# Altium PCB mother_board_2023-07-21.pcbdoc
Units mil, origin at the board's own origin, x right, y up, seen from the top; angles counter-clockwise.
Board outline 4136.22 x 3813.33 mil, 2 copper layers (Top Layer, Bottom Layer); 43 components, 99 nets, 200 pads, 360 vias.
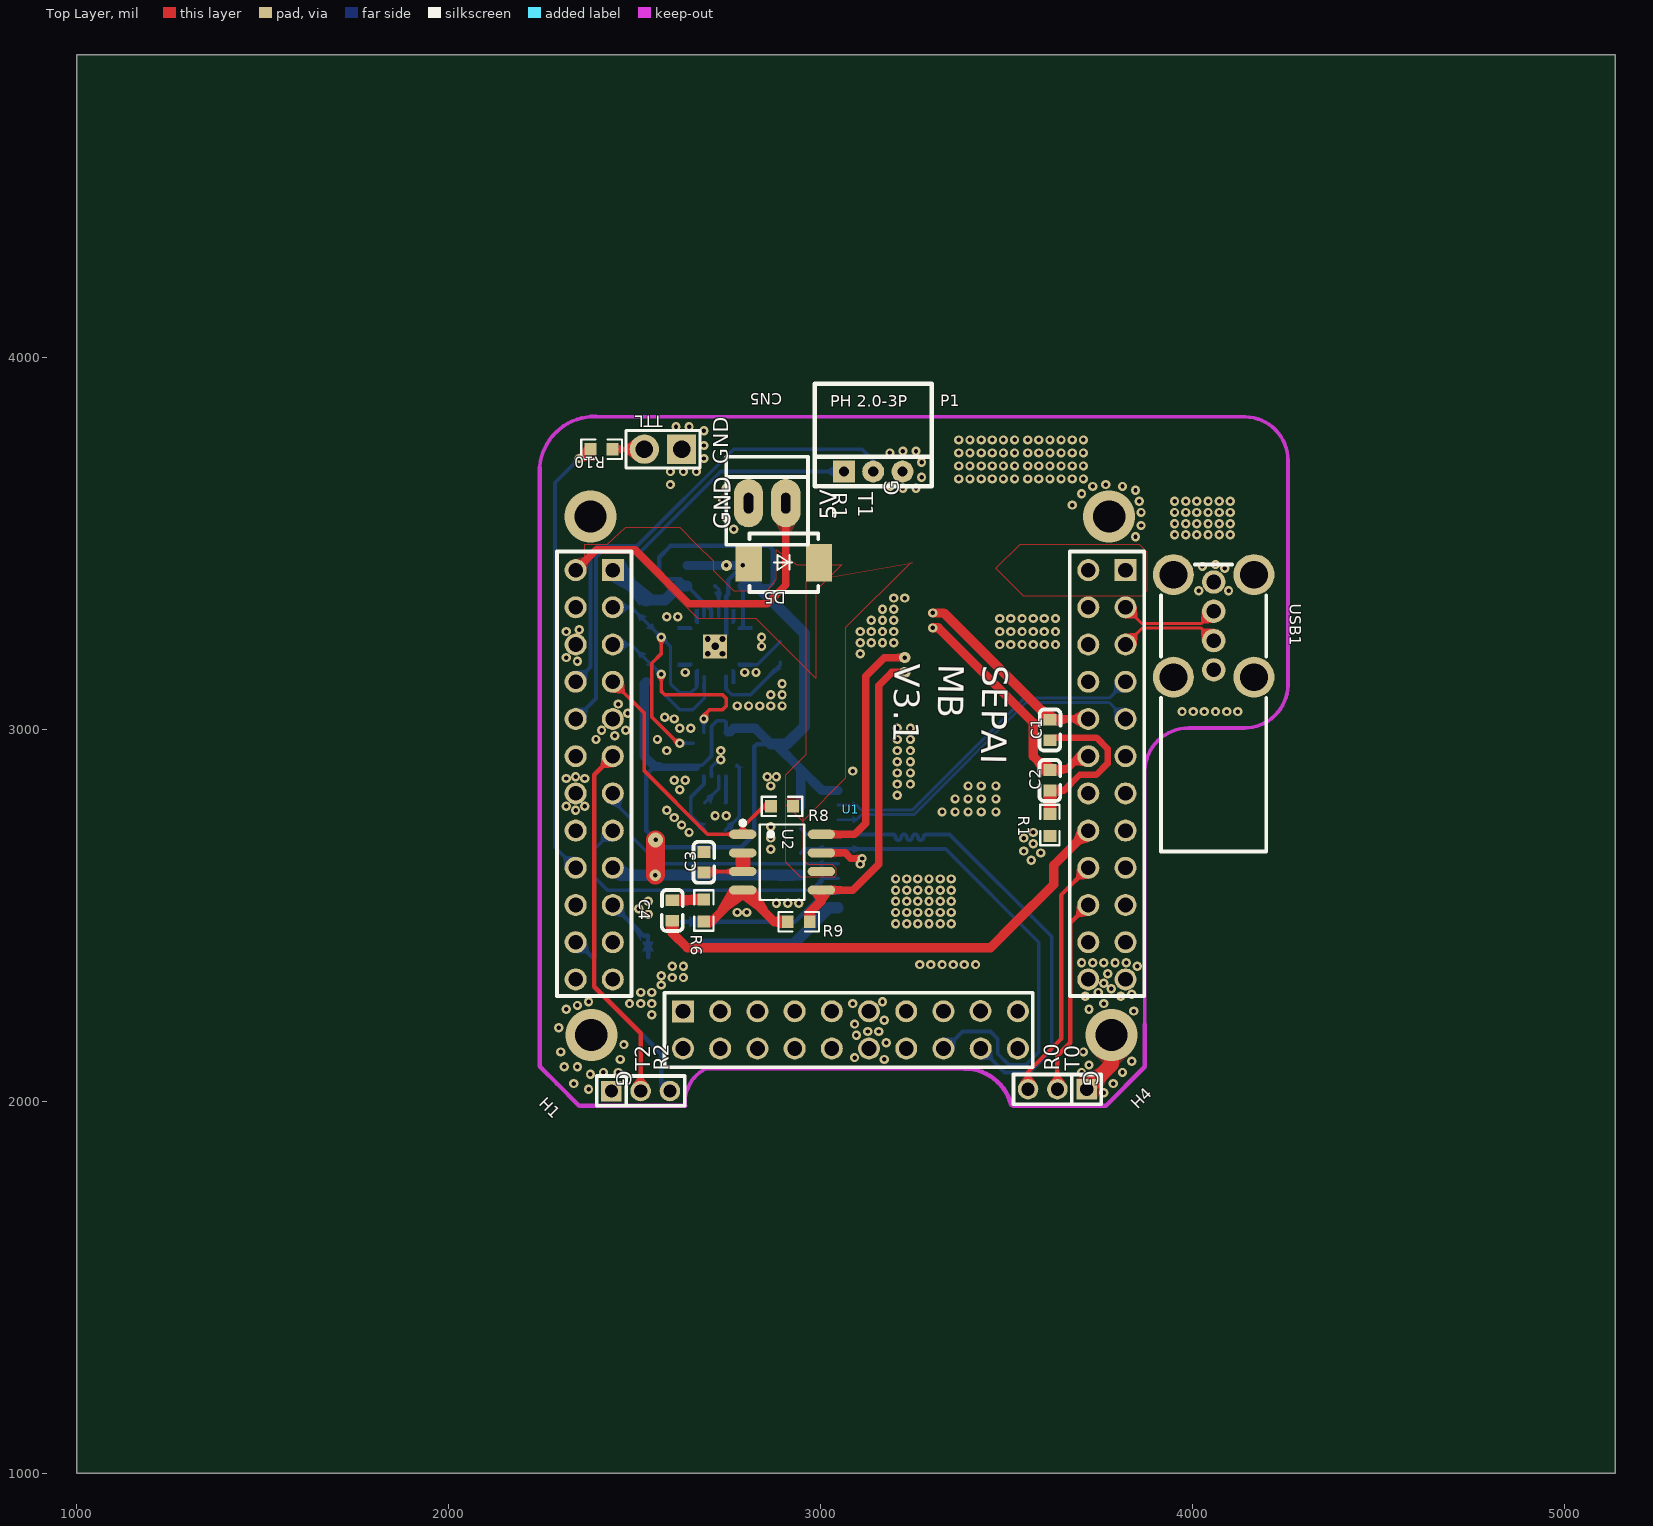
[diagram p0: Top Layer view]
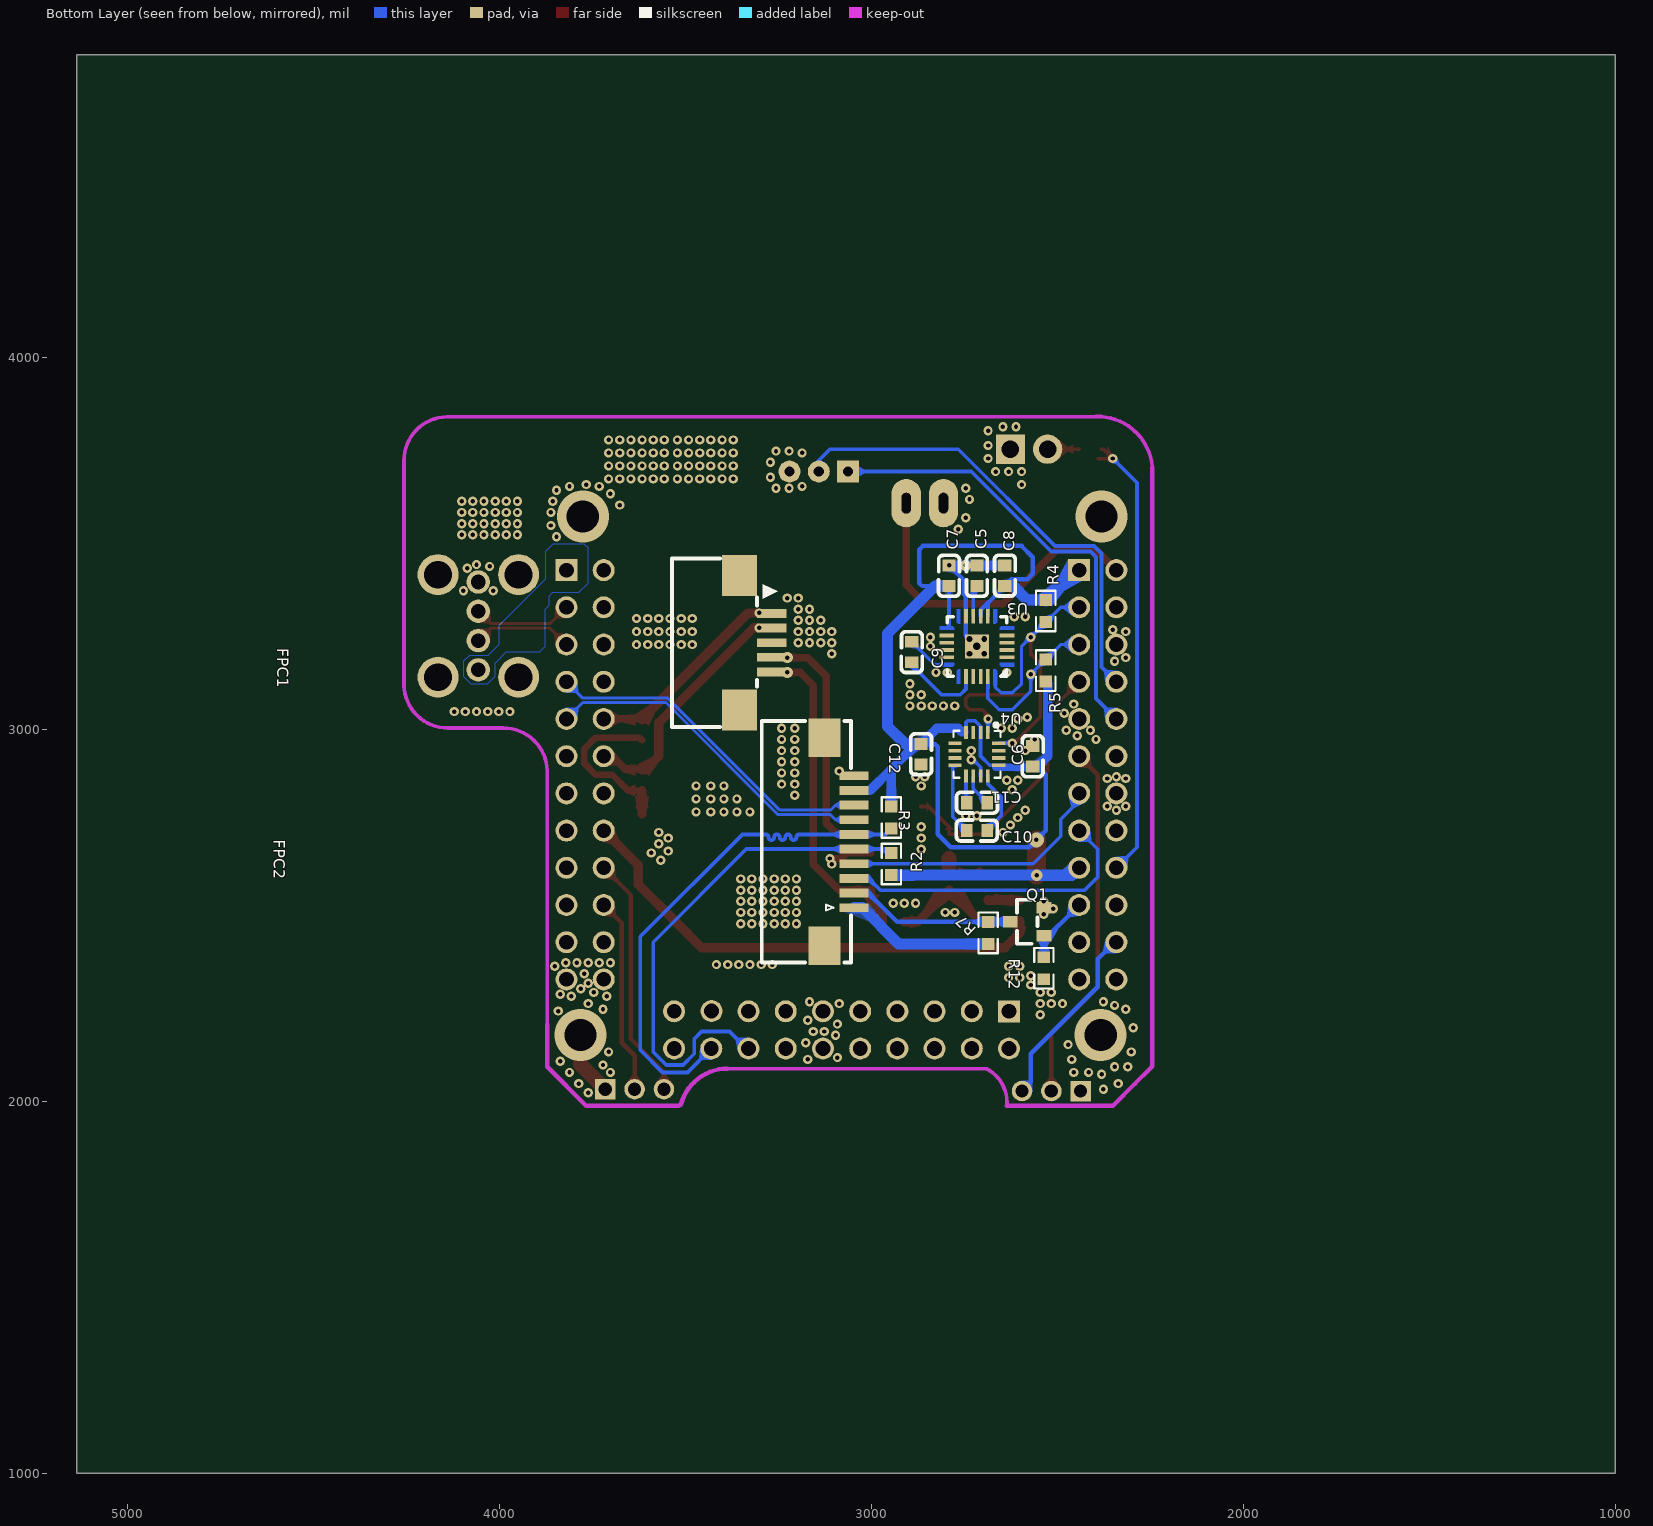
[diagram p1: Bottom Layer view, seen from below]

## Layer stack, top to bottom
Top Layer: signal copper (thickness not stored)
Dielectric: dielectric 12.6, FR-4, Dk 4.8
Bottom Layer: signal copper (thickness not stored)

## Board outline
5136.22,1000 1000,1000 1000,4813.33 5136.22,4813.33

## Components (designator, comment, footprint, x,y, rotation, side; value= is the part's Value field where it differs from the comment)
C1 "33pF" C0603#1 3616.22,2997.53 r270 top
C2 "33pF" C0603#1 3616.22,2862.53 r90 top
C3 "1.0uF" C0603#1 2686.22,2642.53 r90 top
C4 "0.39uF" C0603#1 2601.22,2512.53 r270 top
C5 "0.1uF" C0603#2 2716.22,3412.53 r270 bottom
C6 "0.1uF" C0603#2 2566.22,2927.53 r270 bottom
C7 "0.1uF" C0603#2 2791.22,3412.53 r270 bottom
C8 "0.1uF" C0603#2 2641.22,3412.53 r90 bottom
C9 "2.2nF" C0603#2 2891.22,3207.53 r270 bottom
C10 "0.22uF" C0603#2 2716.22,2727.53 r0 bottom
C11 "4.7uF" C0603#2 2716.22,2802.53 r180 bottom
C12 "0.1uF" C0603#2 2866.22,2932.53 r90 bottom
CN5 "640454-2" CONN-TH_640454-2 2856.22,3607.53 r180 top
D5 "SMBJ5.0A_C10204" SMB_L4.6-W3.6-LS5.3-R-RD 2901.22,3447.53 r180 top
FPC1 "FFC10001-05SBB124W5M" FFC-SMD_FFC10001-05SBB124W5M 3311.22,3232.53 r90 bottom
FPC2 "FFC10001-10SBB124W5M" FFC-SMD_FFC10001-10SBB124W5M 3086.22,2697.53 r90 bottom
H1 "PZ200V-11-03P" HDR-TH_3P-P2.00-V-M 2516.22,2027.53 r0 top
H4 "PZ200V-11-03P" HDR-TH_3P-P2.00-V-M 3636.22,2032.53 r180 top
P1 "PH 2.0-3P 弯针" "PH 2.0-3P" 3141.22,3692.53 r0 top
Q1 "2N7002H-7" SOT-23_L2.9-W1.3-P1.90-LS2.4-BR 2581.22,2482.53 r0 bottom
R1 "0" MY_R0603#1 3616.22,2742.53 r270 top
R2 "2.2K" MY_R0603#2 2946.22,2637.53 r270 bottom
R3 "2.2K" MY_R0603#2 2946.22,2762.53 r90 bottom
R4 "2.2K" MY_R0603#2 2531.22,3317.53 r90 bottom
R5 "2.2K" MY_R0603#2 2531.22,3157.53 r270 bottom
R6 "20K" MY_R0603#1 2686.22,2512.53 r270 top
R7 "300" MY_R0603#2 2686.22,2452.53 r270 bottom
R8 "10K" MY_R0603#1 2896.22,2792.53 r0 top
R9 "20K" MY_R0603#1 2941.22,2482.53 r0 top
R10 "2.2K" MY_R0603#1 2411.22,3752.53 r180 top
R12 "10K" MY_R0603#2 2536.22,2357.53 r90 bottom
TTL "PZ254-1-02-Z-8.5" HDR-TH_2P-P2.54-V-M 2576.22,3752.53 r180 top
U1 "NANO Pi NEO CORE" NANO_PI_MOD 2441.22,2327.53 r0 top
U2 "FM8002A" SOP-8_L4.9-W3.9-P1.27-LS6.0-BL 2896.22,2642.53 r270 top
U3 "MPU-6050_C24112" LGA-24_L4.0-W4.0-P0.50-BL 2716.22,3222.53 r180 bottom
U4 "QMC5883L" MY_LGA-16_L3.0-W3.0-P0.50-BL_SQ 2716.22,2932.53 r180 bottom
USB1 "USB04-212-17-10" USB-A-TH_USB04-212-17-10B 4056.22,3277.53 r0 top
? "" ? 3076.22,3857.53 r0 top
? "" ? 2156.81,2875.13 r0 top
? "" ? 3136.22,2084.77 r0 top
? "" ? 3078.72,3899.43 r0 top
? "" ? 1986.61,2875.03 r0 top
? "" ? 2065.22,3755.02 r0 top

## Footprints (in the part's own frame and the unit in brackets; to place one, negate y for a bottom-side part, rotate by r counter-clockwise, add the part's x,y. Pads: shape width x height; smd on the part's side, far side on the other; paste and mask are expansions set on the pad)
C0603#1 [mm]
  rect 0.8x0.9 smd paste+0 mask+0.051: 1(-0.7,0) 2(0.7,0)
  silkscreen extent -1.41,-0.71 1.39,0.72
C0603#2 [mm]
  rect 0.8x0.9 smd paste+0 mask+0.051: 1(0.7,0) 2(-0.7,0)
  silkscreen extent -1.39,-0.72 1.41,0.71
CONN-TH_640454-2 [mil]
  oval 78.74x130 hole 25 slot 55 at 90 deg paste+0 mask+2: 1(-50,-0.01) 2(50,-0.01)
  silkscreen extent -110,-125 110,111
FFC-SMD_FFC10001-05SBB124W5M [mm]
  rect 0.6x2 smd paste+0 mask+0.051: 1(2,-1.1) 2(1,-1.1) 3(0,-1.1) 4(-1,-1.1) 5(-2,-1.1)
  rect 2.8x2.4 smd paste+0 mask+0.051: 6(-4.6,1.1) 7(4.6,1.1)
  silkscreen extent -5.75,-1.5 5.75,5.7
FFC-SMD_FFC10001-10SBB124W5M [mm]
  rect 0.6x2 smd paste+0 mask+0.051: 1(-4.5,-1) 2(-3.5,-1) 3(-2.5,-1) 4(-1.5,-1) 5(-0.5,-1) 6(0.5,-1) 7(1.5,-1) 8(2.5,-1) 9(3.5,-1) 10(4.5,-1)
  rect 2.6x2.2 smd paste+0 mask+0.051: 11(-7.1,1) 12(7.1,1)
  silkscreen extent -8.25,-0.8 8.25,5.3
HDR-TH_2P-P2.54-V-M [mm]
  rect 2x2 hole 1.2 paste+0 mask+0.051: 1(-1.27,0)
  round 2 hole 1.2 paste+0 mask+0.051: 2(1.27,0)
  silkscreen extent -2.54,-1.27 2.54,1.27
HDR-TH_3P-P2.00-V-M [mm]
  rect 1.4x1.4 hole 0.9 paste+0 mask+0.051: 1(-2,0)
  round 1.4 hole 0.9 paste+0 mask+0.051: 2(0,0) 3(2,0)
  silkscreen extent -2.99,-1 3,1.03
LGA-24_L4.0-W4.0-P0.50-BL [mm]
  rect 1x0.25 smd paste+0 mask+0.05: 2(2.05,-0.75) 3(2.05,-0.25) 4(2.05,0.25) 5(2.05,0.75) 14(-2.05,0.75) 15(-2.05,0.25) 16(-2.05,-0.25) 17(-2.05,-0.75)
  rect 0.25x1 smd paste+0 mask+0.05: 8(0.75,2.05) 9(0.25,2.05) 10(-0.25,2.05) 11(-0.75,2.05) 20(-0.75,-2.05) 21(-0.25,-2.05) 22(0.25,-2.05) 23(0.75,-2.05)
  Top Layer region: 2.55,-1.375 1.65,-1.375 1.55,-1.275 1.55,-1.125 2.55,-1.125
  Top Layer region: 1.375,-2.55 1.125,-2.55 1.125,-1.55 1.275,-1.55 1.375,-1.65
  Top Layer region: -1.375,-2.55 -1.125,-2.55 -1.125,-1.55 -1.275,-1.55 -1.375,-1.65
  Top Layer region: 1.375,2.55 1.125,2.55 1.125,1.55 1.275,1.55 1.375,1.65
  Top Layer region: -1.375,2.55 -1.125,2.55 -1.125,1.55 -1.275,1.55 -1.375,1.65
  Top Layer region: 2.55,1.375 1.65,1.375 1.55,1.275 1.55,1.125 2.55,1.125
  Top Layer region: -2.55,1.375 -1.65,1.375 -1.55,1.275 -1.55,1.125 -2.55,1.125
  Top Layer region: -2.55,-1.375 -1.65,-1.375 -1.55,-1.275 -1.55,-1.125 -2.55,-1.125
  silkscreen extent -2.03,-2.03 2.03,2.03
MY_LGA-16_L3.0-W3.0-P0.50-BL_SQ [mm]
  rect 0.25x0.9 smd paste+0 mask+0.051: 1(0.75,1.488) 2(0.25,1.488) 3(-0.25,1.488) 4(-0.75,1.488) 9(-0.75,-1.488) 10(-0.25,-1.488) 11(0.25,-1.488) 12(0.75,-1.488)
  rect 0.9x0.25 smd paste+0 mask+0.051: 5(-1.488,0.75) 6(-1.488,0.25) 7(-1.488,-0.25) 8(-1.488,-0.75) 13(1.488,-0.75) 14(1.488,-0.25) 15(1.488,0.25) 16(1.488,0.75)
  silkscreen extent -1.61,-1.6 1.61,2.13
MY_R0603#1 [mil]
  rect 31.75x34.02 smd paste-3937.01 mask+2: 1(-29.66,0) 2(29.65,0)
  silkscreen extent -55,-26 55,26
MY_R0603#2 [mil]
  rect 31.75x34.02 smd paste-3937.01 mask+2: 1(29.65,0) 2(-29.66,0)
  silkscreen extent -55,-26 55,26
NANO_PI_MOD [mm]
  rect 1.5x1.5 hole 1 paste+0 mask+0.051: 1(35.006,27.94) 25(4.796,-2.18) 45(0.006,27.94)
  round 1.5 hole 1 paste+0 mask+0.051: 2(35.006,25.4) 3(35.006,22.86) 4(35.006,20.32) 5(35.006,17.78) 6(35.006,15.24) 7(35.006,12.7) 8(35.006,10.16) 9(35.006,7.62) 10(35.006,5.08) 11(35.006,2.54) 12(35.006,0) 13(32.466,27.94) 14(32.466,25.4) 15(32.466,22.86) 16(32.466,20.32) 17(32.466,17.78) 18(32.466,15.24) 19(32.466,12.7) 20(32.466,10.16) 21(32.466,7.62) 22(32.466,5.08) 23(32.466,2.54) 24(32.466,0) 26(7.336,-2.18) 27(9.876,-2.18) 28(12.416,-2.18) 29(14.956,-2.18) 30(17.496,-2.18) 31(20.036,-2.18) 32(22.576,-2.18) 33(25.1,-2.159) 34(27.656,-2.18) 35(4.796,-4.72) 36(7.336,-4.72) 37(9.876,-4.72) 38(12.416,-4.72) 39(14.956,-4.72) 40(17.496,-4.72) 41(20.036,-4.72) 42(22.576,-4.72) 43(25.116,-4.72) 44(27.656,-4.72) 46(0.006,25.4) 47(0.006,22.86) 48(0.006,20.32) 49(0.006,17.78) 50(0.006,15.24) 51(0.006,12.7) 52(0.006,10.16) 53(0.006,7.62) 54(0.006,5.08) 55(0.006,2.54) 56(0.006,0) 57(-2.534,27.94) 58(-2.534,25.4) 59(-2.534,22.86) 60(-2.534,20.32) 61(-2.534,17.78) 62(-2.534,15.24) 63(-2.534,12.7) 64(-2.534,10.16) 65(-2.534,7.62) 66(-2.534,5.08) 67(-2.534,2.54) 68(-2.534,0)
  silkscreen extent -3.8,-5.99 36.28,29.21
"PH 2.0-3P" [mm]
  rect 1.5x1.5 hole 0.7 paste+0 mask+0.102: 1(-2,0)
  round 1.5 hole 0.7 paste+0 mask+0.102: 2(0,0) 3(1.999,0)
  silkscreen extent -4,-1 4,6
SMB_L4.6-W3.6-LS5.3-R-RD [mm]
  rect 1.8x2.54 smd paste+0 mask+0.051: 1(2.4,0) 2(-2.4,0)
  silkscreen extent -2.35,-2 2.35,2
SOP-8_L4.9-W3.9-P1.27-LS6.0-BL [mm]
  oval 0.63x1.865 smd paste+0 mask+0.051: 1(-1.905,-2.682) 2(-0.635,-2.682) 3(0.635,-2.682) 4(1.905,-2.682) 5(1.905,2.682) 6(0.635,2.682) 7(-0.635,2.682) 8(-1.905,2.682)
  silkscreen extent -2.82,-2.83 2.58,1.52
SOT-23_L2.9-W1.3-P1.90-LS2.4-BR [mm]
  rect 1x0.8 smd paste+0 mask+0.051: 1(-1.15,0.95) 2(-1.15,-0.95) 3(1.15,0)
  silkscreen extent -0.7,-1.5 0.7,1.5
USB-A-TH_USB04-212-17-10B [mm]
  round 1.6 hole 1 paste+0 mask+0.051: 1(0,-3) 2(0,-1) 3(0,1) 4(0,3)
  round 2.8 hole 1.9 paste+0 mask+0.051: 5(-2.75,-3.5) 5(-2.75,3.5) 5(2.75,-3.5) 5(2.75,3.5)
  silkscreen extent -3.6,-15.4 3.6,4.2
? [mil]

## Free pads (board coordinates)
  rect 65x65 hole 20 paste+0 mask+2: 1(2716.22,3222.53)

## Via types
v1: diameter 25, hole 12.01, Top Layer to Bottom Layer, tented both sides, 339 vias
v2: diameter 25, hole 12, Top Layer to Bottom Layer, tented both sides, 5 vias
v3: diameter 140, hole 86.61, Top Layer to Bottom Layer, tented both sides, 4 vias
v4: diameter 25, hole 15, Top Layer to Bottom Layer, tented both sides, 4 vias
v5: diameter 30, hole 12, Top Layer to Bottom Layer, tented both sides, 3 vias
v6: diameter 30, hole 12.01, Top Layer to Bottom Layer, tented both sides, 2 vias
v7: diameter 24.41, hole 12.2, Top Layer to Bottom Layer, tented both sides, 2 vias
v8: diameter 40, hole 12, Top Layer to Bottom Layer, tented both sides, 1 vias

## Nets (pads, with @x,y where several pads share a name; then routed paths per layer and width w, separated by ;. In a path a pad name is that pad's centre, name@x,y a point inside that pad or via, vN(x,y) a via of type N, cw(c..) or ccw(c..) an arc to the next point about the centre after c; other vN are vias at no path point)
3.3V: C6.1 C7.1 C8.2 C12.1 FPC2.9 R2.1 R3.1 R4.1 R5.1 U1.44 U1.45 U1.53 U3.8 U3.9 U4.2 U4.4 U4.13 | length 4160.9
  Top Layer w50: v5(2555.59,2607.59) 2556.22,2608.22 v8(2556.22,2702.53)
  Bottom Layer w10: C8.2@2641.22,3384.93 2686.72,3339.53 U3.8 ; U4.13 2681.72,2903.03 2706.42,2927.73 U4.2 2706.42,3007.73 2721.22,3022.53 2741.22,3022.53 2745.72,3018.03 U4.4 ; C7.1@2791.22,3384.93 2791.22,3277.43 2796.92,3271.73
  Bottom Layer w12: C6.1@2566.22,2899.93 2553.62,2899.93 2531.22,2877.53 2531.22,2727.53 v8(2556.22,2702.53) 2576.22,2682.53 2786.22,2682.53 2821.22,2717.53 2821.22,2952.53 2828.82,2960.13 C12.1 ; C8.2@2641.22,3384.93 2623.62,3402.53 2581.22,3402.53 2566.22,3417.53 2566.22,3462.53 2596.22,3492.53 2861.22,3492.53 2871.22,3482.53 2871.22,3392.53 2863.62,3384.93 C7.1@2791.22,3384.93 ; 2686.72,3339.53 2706.42,3319.83 U3.9
  Bottom Layer w20: C6.1@2566.22,2899.93 2568.62,2897.53 2666.22,2897.53
  Bottom Layer w25: R5.1@2531.22,3127.83 2526.22,3122.83 2526.22,2927.53 2553.82,2899.93 C6.1@2566.22,2899.93 ; 2751.22,2992.53 2756.22,2992.53 2766.22,3002.53 2823.82,3002.53 C12.1 2878.62,2960.13 2946.22,2892.53 ; R3.1 2946.22,2892.53 ; FPC2.9 3003.42,2835.33 2946.22,2892.53
  Bottom Layer w30: U1.53@2441.42,2627.53 2461.42,2607.53 v5(2555.59,2607.59) ; R4.1 2581.22,3347.53 2618.62,3384.93 C8.2@2641.22,3384.93 ; v5(2555.59,2607.59) R2.1@2946.22,2607.83 ; C7.1@2791.22,3384.93 2828.82,3384.93 2956.22,3257.53 2956.22,3007.53 2908.82,2960.13 C12.1
  Bottom Layer w35: U1.45@2441.42,3427.53 2450.92,3427.53 R4.1
5V: CN5.1 D5.2 FPC2.1 R7.1 R8.2 U1.1 U1.23 U1.33 U1.34 U1.57 U1.58 U2.6 USB1.1 | length 1289.3
  Top Layer w20: U1.57@2341.42,3427.53 2396.42,3482.53 2501.22,3482.53 2646.22,3337.53 2856.22,3337.53 2906.22,3387.53 CN5.1
  Bottom Layer w30: R7.1@2686.22,2422.83 2926.52,2422.83 3024.02,2520.33 FPC2.1@3046.82,2520.33
AGND: C1.2 C2.1 R1.1 | length 458.3
  Top Layer w17.72: C2.1@3616.22,2834.93 3653.62,2834.93 3696.22,2877.53 3741.22,2877.53 3771.22,2907.53 3771.22,2947.53 3741.22,2977.53 3623.82,2977.53 C1.2@3616.22,2969.93
  Top Layer w25: R1.1 C2.1@3616.22,2834.93
D1+: U1.2 USB1.3 | length 268.9
  Top Layer w7.99: U1.2 3863.46,3283.49 3907.49,3283.49 3945.15,3283.49 3982.81,3283.49 4022.81,3283.49 USB1.3
D1-: U1.3 USB1.2 | length 268.9
  Top Layer w7.99: U1.3 3863.46,3271.56 3907.49,3271.56 3940.21,3271.56 3977.87,3271.56 4022.81,3271.56 USB1.2
D2+: FPC2.8 U1.4 | length 921.3
  Bottom Layer w7.99: FPC2.8@3046.82,2795.93 3096.22,2795.93 3109.92,2782.23 3149.92,2782.23 3245.92,2782.23 3251.22,2787.53 3547.22,3083.53 3731.32,3083.53 3775.42,3083.53 U1.4
D2-: FPC2.7 U1.5 | length 921.2
  Bottom Layer w7.99: FPC2.7 3096.22,2756.63 3109.92,2770.33 3149.92,2770.33 3250.82,2770.33 3256.12,2775.63 3552.12,3071.53 3731.32,3071.53 3775.42,3071.53 U1.5
FPC1_3: FPC1.3
FPC1_6: FPC1.6
FPC1_7: FPC1.7
FPC2_11: FPC2.11
FPC2_12: FPC2.12
GND: C3.2 C5.2 C6.2 C7.2 C8.1 C9.2 C11.2 C12.2 CN5.2 D5.1 FPC2.10 H1.1 H4.1 P1.3 pad.1 Q1.2 R1.2 R12.2 TTL.1 U1.12 U1.24 U1.30 U1.40 U1.49 U1.59 U1.63 U1.66 U2.7 U3.11 U4.9 U4.11 USB1.4 | length 936.6
  Top Layer w20: U2.7 3066.22,2667.53 3081.22,2652.53 v1(3111.22,2652.53)
  Top Layer w39.37: H4.1@3714.92,2032.53 3781.72,2099.33 v3@3781.72,2178.23
  Bottom Layer w10: U4.11@2706.42,2873.93 2706.22,2897.53 2726.22,2917.53 v1(2731.22,2917.53) ; C11.2 2745.72,2802.53 U4.9@2745.72,2873.93 ; 2796.92,3173.33 2829.42,3173.33 C9.2
  Bottom Layer w12: pad.1 2745.72,3252.03 U3.11 2745.72,3357.03 2751.22,3362.53 2751.22,3400.13 v5(2791.22,3440.09)
  Bottom Layer w25: C8.1 C5.2@2715.12,3440.13 ; C5.2 v5(2791.22,3440.09)
  other v1: 3761.22,2022.53 2376.22,2032.53 2336.22,2047.53 3786.22,2047.53 2381.22,2072.53 2416.22,2077.53 2456.22,2077.53 3701.22,2077.53 3811.22,2077.53 2311.22,2092.53 2346.22,2092.53 3721.22,2097.53 3836.22,2107.53 2461.22,2112.53 3171.22,2112.53 3091.22,2117.53 2301.22,2132.53 3706.22,2132.53 2471.22,2152.53 3176.22,2157.53 3096.22,2177.53 3126.22,2187.53 3156.22,2187.53 2296.22,2197.53 3091.22,2207.53 3171.22,2217.53 2546.22,2232.53 3841.22,2242.53 2316.22,2247.53 3721.22,2247.53 2346.22,2257.53 2486.22,2262.53 2516.22,2262.53 2546.22,2262.53 3086.22,2262.53 3761.22,2262.53 2376.22,2267.53 3166.22,2267.53 3711.22,2282.53 3806.22,2282.53 3836.22,2287.53 2516.22,2292.53 2546.22,2292.53 3746.22,2292.53 3781.22,2302.53 2571.22,2312.53 3761.22,2317.53 2601.22,2332.53 2631.22,2332.53 2571.22,2337.53 3771.22,2342.53 2601.22,2362.53 2631.22,2362.53 3851.22,2362.53 3266.22,2367.53 3296.22,2367.53 3326.22,2367.53 3356.22,2367.53 3386.22,2367.53 3416.22,2367.53 3701.22,2372.53 3731.22,2372.53 3761.22,2372.53 3791.22,2372.53 3821.22,2372.53 3201.22,2477.53 3231.22,2477.53 3261.22,2477.53 3291.22,2477.53 3321.22,2477.53 3351.22,2477.53 2536.22,2502.53 2776.22,2507.53 2801.22,2507.53 3201.22,2507.53 3231.22,2507.53 3261.22,2507.53 3291.22,2507.53 3321.22,2507.53 3351.22,2507.53 2511.22,2517.53 2881.22,2532.53 2911.22,2532.53 2941.22,2532.53 2536.22,2537.53 3201.22,2537.53 3231.22,2537.53 3261.22,2537.53 3291.22,2537.53 3321.22,2537.53 3351.22,2537.53 3201.22,2567.53 3231.22,2567.53 3261.22,2567.53 3291.22,2567.53 3321.22,2567.53 3351.22,2567.53 3201.22,2597.53 3231.22,2597.53 3261.22,2597.53 3291.22,2597.53 3321.22,2597.53 3351.22,2597.53 3106.22,2637.53 3566.22,2647.53 3591.22,2667.53 3546.22,2672.53 2866.22,2677.53 3571.22,2692.53 2866.22,2707.53 3546.22,2707.53 2646.22,2722.53 3571.22,2722.53 2866.22,2737.53 2626.22,2742.53 2606.22,2762.53 2716.22,2767.53 2746.22,2767.53 3326.22,2777.53 3361.22,2777.53 3396.22,2777.53 3431.22,2777.53 3471.22,2777.53 2341.22,2782.53 2586.22,2782.53 2316.22,2792.53 2366.22,2792.53 3361.22,2812.53 3396.22,2812.53 3431.22,2812.53 3471.22,2812.53 3206.22,2822.53 2621.22,2837.53 2866.22,2847.53 3396.22,2847.53 3431.22,2847.53 3471.22,2847.53 3206.22,2852.53 3241.22,2852.53 2606.22,2862.53 2636.22,2862.53 2316.22,2867.53 2366.22,2867.53 2341.22,2872.53 2856.22,2872.53 2881.22,2872.53 3206.22,2882.53 3241.22,2882.53 3086.22,2887.53 3206.22,2912.53 3241.22,2912.53 2586.22,2942.53 2731.22,2942.53 3206.22,2942.53 3241.22,2942.53 2396.22,2972.53 2561.22,2972.53 3206.22,2972.53 3241.22,2972.53 2446.22,2982.53 2411.22,2997.53 2476.22,2997.53 2621.22,3002.53 2651.22,3002.53 3206.22,3002.53 3241.22,3002.53 2606.22,3027.53 2581.22,3032.53 2481.22,3042.53 3971.22,3047.53 4001.22,3047.53 4031.22,3047.53 4061.22,3047.53 4091.22,3047.53 4121.22,3047.53 2776.22,3062.53 2806.22,3062.53 2836.22,3062.53 2866.22,3062.53 2896.22,3062.53 2456.22,3067.53 2866.22,3092.53 2896.22,3092.53 2896.22,3122.53 2636.22,3152.53 2796.22,3152.53 2826.22,3152.53 2346.22,3182.53 2316.22,3192.53 3106.22,3202.53 2841.22,3222.53 3481.22,3227.53 3511.22,3227.53 3541.22,3227.53 3571.22,3227.53 3601.22,3227.53 3631.22,3227.53 3106.22,3232.53 3136.22,3232.53 3166.22,3232.53 3196.22,3232.53 2841.22,3247.53 2316.22,3262.53 3106.22,3262.53 3136.22,3262.53 3166.22,3262.53 3196.22,3262.53 3481.22,3262.53 3511.22,3262.53 3541.22,3262.53 3571.22,3262.53 3601.22,3262.53 3631.22,3262.53 2351.22,3267.53 3136.22,3292.53 3166.22,3292.53 3196.22,3292.53 3481.22,3297.53 3511.22,3297.53 3541.22,3297.53 3571.22,3297.53 3601.22,3297.53 3631.22,3297.53 2586.22,3302.53 2616.22,3302.53 3166.22,3322.53 3196.22,3322.53 3196.22,3352.53 3226.22,3352.53 4016.22,3372.53 4096.22,3372.53 4086.22,3432.53 4026.22,3437.53 4061.22,3442.53 3846.22,3517.53 3951.22,3522.53 3981.22,3522.53 4011.22,3522.53 4041.22,3522.53 4071.22,3522.53 4101.22,3522.53 2766.22,3537.53 3861.22,3547.53 3951.22,3552.53 3981.22,3552.53 4011.22,3552.53 4041.22,3552.53 4071.22,3552.53 4101.22,3552.53 2746.22,3568.44 3861.22,3582.53 3951.22,3582.53 3981.22,3582.53 4011.22,3582.53 4041.22,3582.53 4071.22,3582.53 4101.22,3582.53 3676.22,3602.53 3856.22,3612.53 3951.22,3612.53 3981.22,3612.53 4011.22,3612.53 4041.22,3612.53 4071.22,3612.53 4101.22,3612.53 2736.22,3617.53 3701.22,3632.53 3846.22,3642.53 2746.22,3647.53 3221.22,3647.53 3256.22,3647.53 3186.22,3652.53 3731.22,3652.53 3811.22,3652.53 2596.22,3657.53 3766.22,3657.53 3371.22,3672.53 3401.22,3672.53 3431.22,3672.53 3461.22,3672.53 3491.22,3672.53 3521.22,3672.53 3556.22,3672.53 3586.22,3672.53 3616.22,3672.53 3646.22,3672.53 3676.22,3672.53 3706.22,3672.53 3271.22,3677.53 2596.22,3692.53 2631.22,3692.53 2666.22,3692.53 3371.22,3707.53 3401.22,3707.53 3431.22,3707.53 3461.22,3707.53 3491.22,3707.53 3521.22,3707.53 3556.22,3707.53 3586.22,3707.53 3616.22,3707.53 3646.22,3707.53 3676.22,3707.53 3706.22,3707.53 3271.22,3717.53 2686.22,3727.53 3186.22,3742.53 3371.22,3742.53 3401.22,3742.53 3431.22,3742.53 3461.22,3742.53 3491.22,3742.53 3521.22,3742.53 3556.22,3742.53 3586.22,3742.53 3616.22,3742.53 3646.22,3742.53 3676.22,3742.53 3706.22,3742.53 3221.22,3747.53 3256.22,3747.53 2686.22,3762.53 3371.22,3777.53 3401.22,3777.53 3431.22,3777.53 3461.22,3777.53 3491.22,3777.53 3521.22,3777.53 3556.22,3777.53 3586.22,3777.53 3616.22,3777.53 3646.22,3777.53 3676.22,3777.53 3706.22,3777.53 2686.22,3802.53 2611.22,3812.53 2646.22,3812.53
  other v3: 2383.61,2178.28 3781.76,2178.28 3775.47,3571.98
  other v4: 2696.22,3202.53 2736.22,3202.53 2696.22,3242.53 2736.22,3242.53
  other v5: 2746.7,3440.09
INT: FPC2.4 U1.51 | length 721.9
  Bottom Layer w9: U1.51@2441.42,2827.53 2441.42,2807.33 2491.22,2757.53 2491.22,2712.53 2565.32,2638.43 FPC2.4@3046.82,2638.43
LINEOUT: C4.2 U1.20 | length 1328
  Top Layer w25: C4.2@2601.22,2484.93 2601.22,2452.53 2641.22,2412.53 3456.22,2412.53 3521.22,2477.53 3626.22,2582.53 3626.22,2634.33 U1.20
LINESWITCH: R8.1 U1.48 U2.1 | length 728.3
  Top Layer w10: U1.48@2441.42,3127.53 2526.22,3042.73 2526.22,2887.53 2696.22,2717.53 U2.1 2790.62,2736.93 2846.22,2792.53 R8.1@2866.52,2792.53
MICN: C2.2 FPC1.2 U1.18 | length 644.8
  Top Layer w20: C2.2 3618.62,2892.53 3661.22,2892.53 3696.22,2927.53 U1.18
  Top Layer w25: v7(3301.22,3272.53) 3316.22,3272.53 3571.22,3017.53 3571.22,2927.53 3608.62,2890.13 C2.2
MICP: C1.1 FPC1.1 U1.17 | length 539.6
  Top Layer w20: C1.1 3618.62,3027.53 U1.17
  Top Layer w25: v7(3301.22,3312.53) 3331.22,3312.53 3616.22,3027.53 C1.1
R6_1: C4.1 R6.1 | length 87.1
  Top Layer w25: C4.1 2686.22,2540.13 R6.1
RGB: Q1.1 R12.1 U1.54 | length 186.5
  Bottom Layer w12: U1.54@2441.42,2527.53 2523.82,2445.13 Q1.1 R12.1
RGB_5V: FPC2.2 Q1.3 R7.2 | length 452.4
  Bottom Layer w12: Q1.3 R7.2 2930.92,2482.23 3008.42,2559.73 FPC2.2
RX0: H4.3 U1.21 | length 662.1
  Top Layer w12.01: H4.3 3557.47,2078.79 3646.22,2167.53 3646.22,2554.32 U1.21
RX1: P1.1 U1.61 | length 1219.3
  Bottom Layer w10: U1.61@2341.42,3027.53 2396.22,3082.33 2396.22,3462.53 2411.22,3477.53 2516.22,3477.53 2731.22,3692.53 P1.1
RX2: H1.3 U1.67 | length 507.8
  Bottom Layer w12.01: U1.67@2341.42,2427.53 2346.22,2427.53 2391.22,2382.53 2391.22,2307.53 2571.22,2127.53 2571.22,2051.23 H1.3@2594.92,2027.53
S$28987: 
S$28991: 
S$29013: 
S$34258: 
S$35111: 
S$35283: 
S$35290: 
SCL0: R5.2 U1.47 U3.23 U4.1 | length 780.8
  Top Layer w10: v2(2571.22,3147.53) 2571.22,3102.53 2581.22,3092.53 2736.22,3092.53 2746.22,3082.53 2746.22,3062.53 2736.22,3052.53 2701.22,3052.53 2686.22,3037.53 v2(2686.22,3027.53)
  Bottom Layer w9: U1.47@2441.42,3227.53 2491.22,3227.53 R5.2 2548.22,3170.43 ; 2548.18,3170.4 v2(2571.22,3147.53) 2571.22,3102.53 2621.22,3052.53 2656.22,3052.53 2686.72,3083.03 U3.23 ; v2(2686.22,3027.53) 2686.22,2991.63 U4.1
SCL2: FPC2.5 R2.2 U1.42 | length 1393.4
  Bottom Layer w10: R2.2 2956.92,2677.83 FPC2.5 3335.92,2677.83 3586.22,2427.53 3586.22,2132.53 3551.22,2097.53 3506.22,2097.53 3476.22,2127.53 3476.22,2167.53 3456.22,2187.53 3381.22,2187.53 3335.42,2141.73 U1.42@3330.02,2141.73
SDA0: R4.2 U1.46 U4.16 | length 780.2
  Top Layer w10: v2(2571.92,3246.94) 2571.92,3203.23 2546.22,3177.53 2546.22,3032.53 2616.22,2962.53 v2(2621.22,2962.53)
  Bottom Layer w9: U1.46@2441.42,3327.53 2491.52,3327.53 2531.22,3287.83 2548.92,3270.03 ; 2548.93,3270.04 v2(2571.92,3246.94) 2596.22,3222.53 2596.22,3122.53 2621.22,3097.53 2651.22,3097.53 2667.02,3113.33 2667.02,3141.83 ; v2(2621.22,2962.53) 2657.12,2962.53 U4.16@2657.62,2962.03
SDA2: FPC2.6 R3.2 U1.43 | length 1394.2
  Bottom Layer w10: R3.2@2946.22,2732.83 2961.82,2717.23 FPC2.6 3193.82,2717.23 ; 3193.84,2717.23 cw(c3193.83,2709.73) 3201.33,2709.73 ccw(c3208.83,2709.73) 3216.33,2709.73 cw(c3223.83,2709.73) 3223.83,2717.23 cw(c3223.83,2709.73) 3231.33,2709.73 ccw(c3238.83,2709.73) 3246.33,2709.73 cw(c3253.83,2709.73) 3253.83,2717.23 cw(c3253.83,2709.73) 3261.33,2709.73 ccw(c3268.83,2709.73) 3276.33,2709.73 cw(c3283.83,2709.73) 3283.83,2717.23 3346.51,2717.23 3621.22,2442.53 3621.22,2137.53 3561.22,2077.53 3494.21,2077.53 U1.43@3430.01,2141.73
SHUT: FPC2.3 U1.52 | length 829
  Bottom Layer w10: U1.52@2441.42,2727.53 2391.22,2677.33 2391.22,2602.53 2426.22,2567.53 2976.22,2567.53 3007.82,2599.13 FPC2.3
SP1: FPC1.5 R9.2 U2.5 | length 845.7
  Top Layer w20: U2.5 3086.22,2567.53 3156.22,2637.53 3156.22,3117.53 3191.22,3152.53 v6(3226.22,3152.53)
  Top Layer w25: R9.2 2970.92,2507.23 3001.82,2538.13 U2.5
SP2: FPC1.4 U2.8 | length 652.5
  Top Layer w20: U2.8 3091.22,2717.53 3121.22,2747.53 3121.22,3142.53 3171.22,3192.53 v6(3226.22,3192.53)
STM32_RST: R10.2 U1.65 | length 1229.9
  Top Layer w10: R10.2@2381.52,3752.53 2376.22,3752.53 v2(2351.22,3727.53) 2352.18,3726.56 2390.25,3726.56
  Bottom Layer w10: U1.65 2286.22,2682.78 2286.22,3662.53 v2(2351.22,3727.53)
TTL_2: R10.1 TTL.2 | length 85.3
  Top Layer w10: R10.1 TTL.2
TX0: H4.2 U1.22 | length 529.5
  Top Layer w12.01: H4.2 3636.22,2122.53 3671.22,2157.53 3671.22,2479.32 U1.22
TX1: P1.2 U1.60 | length 1279.9
  Bottom Layer w10: U1.60@2341.42,3127.53 2381.22,3167.33 2381.22,3472.53 2401.22,3492.53 2506.22,3492.53 2766.22,3752.53 3111.22,3752.53 3141.22,3722.53 P1.2
TX2: H1.2 U1.50 | length 972.6
  Top Layer w12.01: U1.50@2441.42,2927.53 2391.22,2877.53 2391.22,2307.53 2516.22,2182.53 H1.2
U1_6: U1.6
U1_7: U1.7
U1_8: U1.8
U1_9: U1.9
U1_10: U1.10
U1_11: U1.11
U1_13: U1.13
U1_14: U1.14
U1_15: U1.15
U1_16: U1.16
U1_19: U1.19
U1_25: U1.25
U1_26: U1.26
U1_27: U1.27
U1_28: U1.28
U1_29: U1.29
U1_31: U1.31
U1_32: U1.32
U1_35: U1.35
U1_36: U1.36
U1_37: U1.37
U1_38: U1.38
U1_39: U1.39
U1_41: U1.41
U1_55: U1.55
U1_56: U1.56
U1_62: U1.62
U1_64: U1.64
U1_68: U1.68
U2_2: C3.1 U2.2 U2.3 | length 125.5
  Top Layer w12.01: C3.1@2686.22,2614.93 2688.82,2617.53 U2.3
  Top Layer w39.37: 2791.22,2632.53 2791.22,2652.53
U2_4: R6.2 R9.1 U2.4 | length 295.6
  Top Layer w25: R6.2@2686.22,2482.83 2705.92,2482.83 U2.4 2875.62,2482.53 R9.1@2911.52,2482.53
U3_2: U3.2
U3_3: U3.3
U3_4: U3.4
U3_5: U3.5
U3_6: 
U3_7: 
U3_10: C5.1 U3.10 | length 85.8
  Bottom Layer w10: C5.1@2716.22,3384.93 2726.12,3375.13 U3.10
U3_12: 
U3_14: U3.14
U3_15: U3.15
U3_16: U3.16
U3_17: U3.17
U3_19: 
U3_20: C9.1 U3.20 | length 226.3
  Bottom Layer w10: U3.20 2745.72,3108.03 2761.22,3092.53 2811.22,3092.53 2891.22,3172.53 C9.1@2891.22,3179.93
U3_21: U3.21
U3_22: U3.22
U4_3: U4.3
U4_5: U4.5
U4_6: U4.6
U4_7: U4.7
U4_8: C10.1 U4.8 | length 193.6
  Bottom Layer w10: C10.1 2781.22,2764.93 2781.22,2896.63 U4.8
U4_10: C11.1 U4.10 | length 86.9
  Bottom Layer w10: C11.1@2688.62,2802.53 2726.02,2839.93 U4.10@2726.02,2873.93
U4_12: C10.2 U4.12 | length 176.4
  Bottom Layer w10: U4.12@2686.72,2873.93 2686.22,2852.53 2651.22,2817.53 2651.22,2767.53 2688.62,2730.13 C10.2@2688.62,2727.53
U4_14: U4.14
U4_15: U4.15
pads on no net: USB1.5
copper on no net:
  other v3: 2381.77,3571.98

## Polygon pours and split planes (outlines as drawn)
5V on Bottom Layer (solid): 4096.22,3142.53 4076.22,3122.53 4031.22,3122.53 4011.22,3142.53 4011.22,3177.53 3981.22,3207.53 3891.22,3207.53 3876.22,3222.53 3876.22,3322.53 3866.22,3332.53 3866.22,3357.53 3856.22,3367.53 3786.22,3367.53 3761.22,3392.53 3761.22,3487.53 3771.22,3497.53 3856.22,3497.53 3876.22,3477.53 3876.22,3402.53 4001.22,3277.53 4001.22,3227.53 4031.22,3197.53 4081.22,3197.53 4096.22,3182.53
5V on Bottom Layer (solid): 3356.22,2287.53 3381.22,2262.53 3381.22,2217.53 3391.22,2207.53 3551.22,2207.53 3561.22,2217.53 3561.22,2302.53 3526.22,2337.53 3066.22,2337.53 3041.22,2362.53 3041.22,2477.53 3071.22,2507.53 3086.22,2507.53 3086.22,2532.53 3021.22,2532.53 3006.22,2507.53 2926.22,2427.53 2926.22,2422.53 2671.22,2422.53 2671.22,2332.53 2716.22,2287.53 2901.22,2287.53
3.3V on Bottom Layer (solid): 2516.22,2937.53 2516.22,2722.53 2576.22,2662.53 2801.22,2662.53 2831.22,2692.53 2831.22,2922.53 2846.22,2937.53 2876.22,2937.53 2891.22,2937.53 2891.22,2952.53 2876.22,2967.53 2856.22,2967.53 2846.22,2977.53 2841.22,2977.53 2836.22,2982.53 2831.22,2982.53 2821.22,2992.53 2821.22,2997.53 2801.22,2997.53 2786.22,2997.53 2806.22,2977.53 2806.22,2757.53 2806.22,2732.53 2786.22,2712.53 2771.22,2697.53 2631.22,2697.53 2561.22,2772.53 2561.22,2872.53 2581.22,2892.53 2581.22,2917.53 2546.22,2917.53
3.3V on Bottom Layer (solid): 2416.22,3452.53 2556.22,3452.53 2606.22,3402.53 2656.22,3402.53 2656.22,3372.53 2666.22,3362.53 2666.22,3357.53 2681.22,3342.53 2666.22,3342.53 2656.22,3332.53 2516.22,3332.53 2451.22,3397.53 2416.22,3397.53
3.3V on Bottom Layer (solid): 2501.22,3452.53 2536.22,3452.53 2596.22,3512.53 2891.22,3512.53 3001.22,3402.53 3001.22,3202.53 3001.22,3037.53 3001.22,2947.53 2976.22,2917.53 2976.22,2867.53 3001.22,2827.53 2976.22,2802.53 2976.22,2787.53 2966.22,2777.53 2906.22,2777.53 2906.22,2937.53 2856.22,2972.53 2836.22,2992.53 2746.22,2992.53 2746.22,3012.53 2746.22,3022.53 2771.22,3022.53 2786.22,3037.53 2911.22,3037.53 2941.22,3077.53 2941.22,3227.53 2941.22,3272.53 2861.22,3352.53 2776.22,3382.53 2776.22,3402.53 2851.22,3402.53 2856.22,3407.53 2856.22,3457.53 2841.22,3472.53 2616.22,3472.53 2586.22,3442.53 2586.22,3412.53
GND on Bottom Layer (solid): 2126.22,3922.53 2141.22,3907.53 4391.22,3907.53 4351.22,3867.53 4351.22,1922.53 4341.22,1912.53 2106.22,1912.53
5V on Top Layer (solid): 2866.22,3657.53 2866.22,3522.53 2866.22,3497.53 2866.22,3492.53 2961.22,3397.53 3661.22,3397.53 3676.22,3412.53 3676.22,3457.53 3686.22,3467.53 3751.22,3467.53 3761.22,3457.53 3761.22,3382.53 3786.22,3357.53 3861.22,3357.53 3876.22,3372.53 3876.22,3477.53 3856.22,3497.53 3726.22,3497.53 3606.22,3617.53 3006.22,3617.53 2951.22,3672.53 2936.22,3672.53 2886.22,3672.53
5V on Top Layer (solid): 2966.22,2637.53 3031.22,2637.53 3041.22,2627.53 3041.22,2607.53 3036.22,2602.53 2946.22,2602.53 2906.22,2642.53 2906.22,2812.53 2951.22,2812.53 2951.22,2647.53
5V on Top Layer (solid): 3066.22,2867.53 2951.22,2752.53 2906.22,2797.53 2906.22,2877.53 2961.22,2932.53 2961.22,3397.53 3240.15,3446.47 3066.22,3272.53 3066.22,2867.53
5V on Top Layer (solid): 3240.15,3446.47 3241.22,3447.53 3246.22,3447.53 3240.15,3446.47
5V on Top Layer (solid): 2376.22,3307.53 2356.22,3287.53 2321.22,3287.53 2301.22,3307.53 2301.22,3457.53 2341.22,3497.53 2376.22,3497.53
5V on Top Layer (solid): 2366.22,3497.53 2426.22,3497.53 2476.22,3542.53 2501.22,3542.53 2621.22,3542.53 2666.22,3497.53 2711.22,3452.53 2711.22,3427.53 2766.22,3372.53 2856.22,3372.53 2881.22,3402.53 2881.22,3482.53 2936.22,3442.53 3056.22,3442.53 2986.22,3372.53 2986.22,3137.53 2826.22,3297.53 2671.22,3297.53 2496.22,3472.53 2396.22,3472.53 2366.22,3442.53
5V on Top Layer (solid): 3536.22,3497.53 3856.22,3497.53 3876.22,3477.53 3876.22,3372.53 3861.22,3357.53 3546.22,3357.53 3471.22,3432.53
GND on Top Layer (solid): 2066.22,3952.53 2076.22,3962.53 4441.22,3962.53 4421.22,3942.53 4421.22,1862.53 4406.22,1847.53 1996.22,1847.53

## Keep-outs
Keep-Out Layer:
  lines w10: 2244.86,3704.34 cw(c2392.86,3692.06) 2409.33,3839.65 ; 2636.09,1987.52 cw(c2736.22,1997.53) 2691.22,2087.53
  lines w10 net S$28991: 3871.22,2888.16 cw(c3989.29,2885.1) 3989.29,3003.21 ; 4137.69,3003.08 ccw(c4138.15,3121.19) 4256.22,3118.13 ; 4141.22,3839.66 cw(c4138.16,3721.59) 4256.27,3721.59
  lines w12.01: 3386.22,2087.84 cw(c3386.22,1957.81) 3512.06,1990.53

## Other copper
Top Layer:
  region net SP1: 3026.14,2555.13 3026.14,2579.93 3056.14,2577.53 3056.14,2557.53
  region net SP1: 3026.14,2555.13 2977.51,2555.13 2989.32,2538.13 3014.32,2538.13
  region net SP2: 3026.14,2705.13 3026.14,2729.93 3056.14,2727.53 3056.14,2707.53
  region net U2_4: 2826.84,2570.96 2771.77,2555.13 2822.84,2517.63 2858.19,2517.63
  region net U2_4: 2809.46,2555.13 2754.37,2570.96 2723.04,2517.63 2758.39,2517.63
  region net U2_2: 2766.29,2605.13 2766.29,2629.93 2748.28,2623.54 2748.28,2611.53
  region net LINESWITCH: 2778.12,2729.93 2803.12,2729.93 2795.62,2736.93 2785.62,2736.93
  region net LINESWITCH: 2766.29,2705.13 2766.29,2729.93 2751.29,2722.53 2751.29,2712.53
  region net AGND: 3633.93,2850.72 3633.93,2819.22 3653.62,2826.07 3653.62,2843.79
  region net AGND: 3633.93,2819.22 3598.5,2819.22 3603.72,2781.72 3628.72,2781.72
  region net MICN: 3598.5,2874.34 3627.31,2905.84 3592.78,2923.65 3575.89,2905.18
  region net MICN: 3633.93,2905.84 3633.93,2874.34 3661.22,2882.53 3661.22,2902.53
  region net MICP: 3598.5,3009.34 3633.93,3040.84 3600.3,3061.12 3581.59,3044.48
  region net MICP: 3633.93,3040.84 3633.93,3009.34 3663.93,3017.53 3663.93,3037.53
  region net R6_1: 2618.93,2555.84 2618.93,2524.34 2656.43,2527.63 2656.43,2552.63
  region net LINEOUT: 2618.93,2469.22 2583.5,2469.22 2588.72,2452.53 2613.72,2452.53
  region net U2_2: 2703.93,2630.72 2703.93,2602.52 2721.95,2611.53 2721.95,2623.54
  region net TTL_2: 2456.75,3740.03 2456.75,3765.03 2471.75,3757.53 2471.75,3747.53
  region net STM32_RST: 2366.78,3735.53 2365.69,3760.5 2351.78,3735.17 2352.38,3721.62
  region net U2_4: 2895.69,2499.54 2895.69,2465.53 2875.62,2470.03 2875.62,2495.03
  region net SP1: 2955,2499.54 2986.75,2499.54 2983.42,2507.23 2958.42,2507.23
  region net LINESWITCH: 2850.69,2805.03 2850.69,2780.03 2846.22,2787.53 2846.22,2797.53
  region net R6_1: 2669.21,2558.06 2669.21,2526.31 2631.71,2527.63 2631.71,2552.63
  region net U2_4: 2703.22,2498.75 2703.22,2467 2705.92,2470.33 2705.92,2495.33
  region net AGND: 3633.22,2788.06 3599.21,2788.06 3603.72,2825.56 3628.72,2825.56
  region net STM32_RST: 2363.69,3726.75 2350.43,3740.01 2359.71,3743.1 2366.79,3736.03
  region net STM32_RST: 2360,3736.42 2358.94,3717.7 2367.92,3721.56 2368.49,3731.56
  region net SCL0: 2561.84,3139.26 2580.59,3139.26 2576.22,3130.51 2566.22,3130.51
  region net SDA0: 2562.54,3238.67 2581.29,3238.67 2576.92,3229.92 2566.92,3229.92
  region net SCL0: 2680.32,3038.56 2697.89,3032 2697.31,3041.56 2687.01,3045.4
  region net SDA0: 2619.39,2974.9 2609.18,2959.18 2604.16,2967.52 2609.73,2976.09
  region net SP1: 3216.29,3141.28 3216.29,3163.78 3205.79,3162.53 3205.79,3142.53
  region net SP2: 3216.29,3181.28 3216.29,3203.78 3205.79,3202.53 3205.79,3182.53
  region net D1-: 4024.78,3236.18 4058.19,3269.59 4028.72,3271.3 4023.07,3265.65
  region net D1+: 4024.78,3318.87 4058.19,3285.46 4028.72,3283.75 4023.07,3289.4
  region net TX2: 2412,2929.47 2443.23,2898.06 2417.19,2894.93 2408.73,2903.45
  region net LINESWITCH: 2439.59,3098.07 2470.94,3129.36 2473.4,3102.62 2466.33,3095.55
  region net D1+: 3817.57,3298.06 3848.89,3329.38 3850.67,3301.93 3845.02,3296.28
  region net D1-: 3817.57,3257 3848.88,3225.68 3850.67,3253.13 3845.02,3258.78
  region net MICP: 3699.89,3005.39 3699.89,3049.68 3679.22,3037.53 3679.22,3017.53
  region net MICN: 3709.08,2899.87 3693.26,2941.25 3677.95,2923.41 3685.77,2902.95
  region net LINEOUT: 3689.95,2729.39 3721.27,2698.06 3699.83,2690.27 3682.16,2707.95
  region net RX0: 3689.95,2629.38 3721.27,2598.06 3695.24,2594.86 3686.75,2603.35
  region net TX0: 3689.95,2529.38 3721.27,2498.06 3695.24,2494.86 3686.75,2503.35
  region net RX0: 3578.14,2050.76 3536.81,2050.76 3551.47,2070.05 3563.48,2070.05
  region net TX0: 3656.89,2050.76 3615.55,2050.76 3630.21,2070.05 3642.22,2070.05
  region net TX2: 2536.89,2045.76 2495.55,2045.76 2510.21,2065.05 2522.22,2065.05
  region net TTL_2: 2500.18,3723.01 2500.18,3782.06 2472.62,3757.53 2472.62,3747.53
Bottom Layer:
  region net SDA0: 2662.08,3122.14 2671.92,3122.14 2671.52,3113.33 2662.52,3113.33
  region net 3.3V: 2470.99,3457.06 2435.27,3398 2481.2,3372.5 2499.86,3403.34
  region net RX1: 3032.95,3680.03 3032.95,3705.03 3017.95,3697.53 3017.95,3687.53
  region net D2+: 3086.22,2785.94 3086.22,2805.92 3096.22,2799.93 3096.22,2791.94
  region net D2-: 3086.22,2746.64 3086.22,2766.62 3096.22,2760.63 3096.22,2752.64
  region net SDA2: 3086.22,2705.41 3086.22,2729.03 3101.22,2722.23 3101.22,2712.23
  region net SDA2: 3007.48,2729.03 3007.48,2705.41 2992.48,2712.23 2992.48,2722.23
  region net SCL2: 3086.22,2666.04 3086.22,2689.66 3101.22,2682.83 3101.22,2672.83
  region net SCL2: 3007.48,2689.66 3007.48,2666.04 2992.48,2672.83 2992.48,2682.83
  region net INT: 3007.48,2649.68 3007.48,2627.18 2993.98,2633.93 2993.98,2642.93
  region net SHUT: 3007.48,2610.92 3007.48,2587.3 2992.48,2576.72 2992.48,2590.86
  region net RGB_5V: 3007.48,2571.55 3007.48,2547.93 2989.48,2532.31 2989.48,2549.28
  region net RGB: 2521,2429.38 2551,2429.38 2542.09,2411.38 2530.09,2411.38
  region net RGB: 2516.26,2430.89 2516.79,2460.88 2499.1,2478.33 2498.8,2461.66
  region net RGB_5V: 2646.18,2467.43 2646.18,2497.43 2664.18,2488.34 2664.18,2476.34
  region net U4_8: 2784.75,2900.17 2792.27,2898.08 2778.48,2898.08 2784.75,2900.17
  region net U4_8: 2774.15,2896.63 2767.27,2898.08 2778.48,2898.08 2774.15,2896.63
  region net U4_12: 2691.6,2856.23 2681.76,2878.69 2681.47,2863.37 2691.21,2852.42
  region net U4_10: 2692,2820.25 2704.4,2798.54 2710.78,2817.62 2705.64,2826.62
  region net U4_8: 2747.36,2745.25 2759.52,2723.41 2765.99,2742.63 2760.93,2751.71
  region net U4_12: 2672.91,2729.11 2692,2745.25 2675.16,2750.66 2667.5,2744.18
  region net U3_20: 2873.5,3164.22 2895.41,3164.22 2874.98,3149.22 2860.84,3149.22
  region net U3_10: 2713.62,3369.23 2733.93,3369.23 2731.12,3354.23 2721.12,3354.23
  region net SCL0: 2681.77,3122.14 2691.61,3122.14 2691.22,3108.64 2682.22,3108.64
  region net RGB: 2521.13,2403.06 2551.13,2403.06 2542.04,2421.06 2530.04,2421.06
  region net RGB_5V: 2703.22,2467.23 2703.22,2497.23 2721.22,2488.23 2721.22,2476.23
  region net RGB_5V: 2669.21,2497.32 2669.21,2467.32 2651.21,2476.41 2651.21,2488.41
  region net SCL0: 2514.21,3190.59 2532.94,3203.06 2516.57,3208.38 2508.93,3203.3
  region net SCL0: 2548.22,3184.76 2530.18,3171.31 2544.57,3167.71 2551.38,3173.63
  region net 3.3V: 2514.21,3331.31 2548.22,3363.06 2506.89,3396.3 2481.29,3372.41
  region net SDA0: 2514.21,3290.75 2532.57,3303.75 2516.5,3308.91 2509.05,3303.64
  region net SDA0: 2548.22,3284.54 2529.54,3272 2545.11,3267.48 2552.11,3273.21
  region net 3.3V: 2929.21,2592 2929.21,2623.75 2884.21,2622.8 2884.21,2592.8
  region net SCL2: 2963.22,2665.33 2963.22,2683.06 2978.22,2682.83 2978.22,2672.83
  region net STM32_RST: 2352,3715.06 2338.74,3728.32 2335.65,3719.03 2342.72,3711.96
  region net SCL0: 2561.84,3139.26 2580.59,3139.26 2575.72,3130.51 2566.72,3130.51
  region net SCL0: 2571.95,3160.01 2558.74,3146.7 2555.97,3156.33 2562.31,3162.72
  region net SDA0: 2584.39,3247.69 2571.1,3234.47 2580.73,3231.7 2587.11,3238.05
  region net SDA0: 2572.73,3259.42 2559.44,3246.19 2556.72,3255.83 2563.1,3262.18
  region net SCL0: 2676.84,3019.26 2695.59,3019.26 2690.72,3010.51 2681.72,3010.51
  region net SDA0: 2629.48,2953.16 2629.48,2971.91 2638.23,2967.03 2638.23,2958.03
  region net STM32_RST: 2312,2625.68 2343.31,2657 2316.57,2659.49 2309.5,2652.42
  region net RX1: 2339.59,3057 2370.94,3025.71 2373.4,3052.45 2366.33,3059.52
  region net TX1: 2339.59,3157 2370.94,3125.71 2373.4,3152.45 2366.33,3159.52
  region net RGB: 2439.59,2498.07 2470.94,2529.36 2474.11,2503.32 2465.62,2494.84
  region net 3.3V: 2469.42,2637.03 2447.4,2598.61 2467.74,2592.54 2484.94,2622.55
  region net SHUT: 2412,2729.41 2443.29,2698.06 2416.55,2695.59 2409.48,2702.67
  region net INT: 2469.66,2818.76 2429.24,2800.65 2453.51,2788.88 2462.3,2792.82
  region net SCL0: 2461,3205.39 2461,3249.68 2481.66,3232.03 2481.66,3223.03
  region net SDA0: 2461,3305.39 2461,3349.68 2481.66,3332.03 2481.66,3323.03
  region net RX2: 2370.68,2431.84 2342.09,2398.01 2368.28,2396.98 2376.06,2406.18
  region net SCL2: 3359.22,2137.1 3330.98,2171.22 3357.82,2171.21 3364.22,2163.47
  region net SDA2: 3428.2,2112.23 3459.52,2143.55 3462.01,2116.81 3454.94,2109.74
  region net D2+: 3789.94,3129.38 3821.26,3098.06 3793.81,3096.28 3788.16,3101.93
  region net D2-: 3789.95,3025.68 3821.27,3057 3793.82,3058.78 3788.17,3053.13
  region net TX1: 3163.36,3712.06 3119.07,3712.06 3136.22,3722.53 3146.22,3722.53
  region net RX2: 2567.45,2025.78 2596.66,2055.04 2575.46,2055.48 2566.97,2046.99

## Silkscreen, mask and mechanical layers (free items; w line width, h text height)
Top Overlay:
  text "GND" at 2751.53,3712.53 h40.63 r90
  text "R1" at 3030.9,3637.53 h40.63 r270
  text "T1" at 3100.9,3637.53 h40.63 r270
  text "G" at 3211.53,3627.53 h40.63 r90
  text "5V" at 3043.72,3562.53 h45 r90
  text "GND" at 2758.72,3537.53 h45 r90
  text "SEPAI / MB / V3.1" at 3176.22,3177.53 h118.11 r269
  text "G" at 2450.9,2082.53 h40.63 r270
  text "T2" at 2541.53,2082.53 h40.63 r90
  text "R2" at 2591.53,2082.53 h40.63 r90
  text "R0" at 3641.53,2082.53 h40.63 r90
  text "T0" at 3696.53,2082.53 h40.63 r90
  text "G" at 3705.9,2082.53 h40.63 r270

## Text inside footprints (layer, text, board x,y; h text height)
P1: Top Overlay "PH 2.0-3P" at 3026.22,3866.78 h31.5